# Altium PCB CR99001.PcbDoc
Units mm, origin at the board's own origin, x right, y up, seen from the top; angles counter-clockwise.
Board outline 14 x 14 mm, 2 copper layers (L 01, L 02), stack 1.57 mm thick; 13 components, 12 nets, 33 pads, 1 vias.
Unrouted connection lines stored in the file: 13.
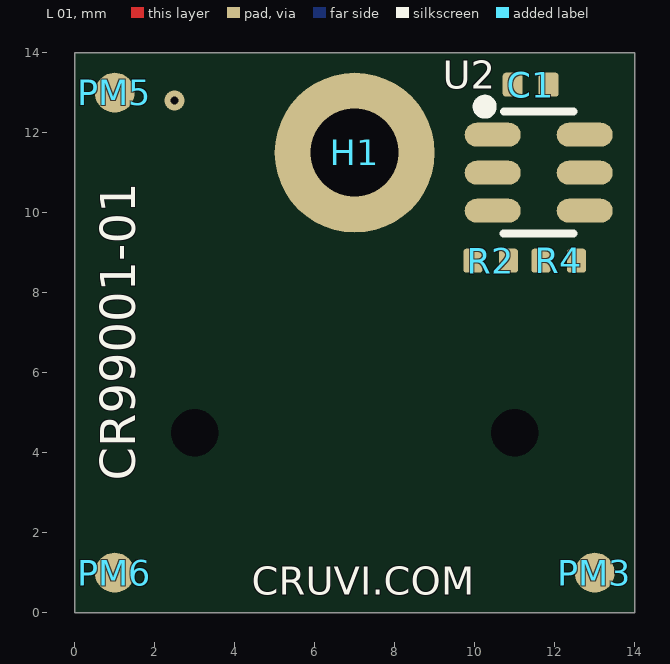
[diagram p0: L 01 view]
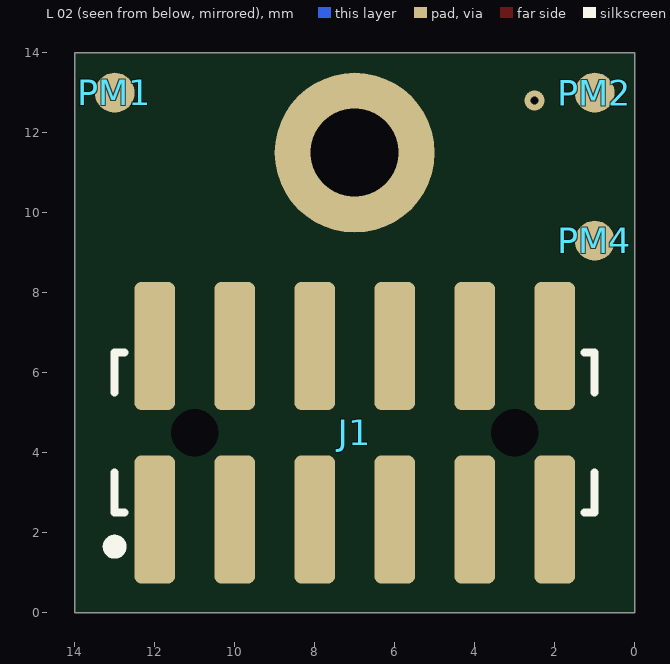
[diagram p1: L 02 view, seen from below]

## Layer stack, top to bottom
Top Solder: solder mask 0.035, Solder Resist, Dk 3.5
L 01: signal copper 0.035
Dielectric1: core 1.5, FR-4, Dk 4.2
L 02: signal copper 0.035
Bottom Solder: solder mask 0.035, Solder Resist, Dk 3.5

## Board outline
0,0 0,14 14,14 14,0

## Design rules (kind name [scope] priority, off if disabled: settings)
BoardOutlineClearance [All] p1: gap=0 except(0.5: Arc-OutlineEdge Track-OutlineEdge SMDPad-OutlineEdge THPad-OutlineEdge Via-OutlineEdge Fill-OutlineEdge Poly-OutlineEdge Region-OutlineEdge)
Clearance Clearance_topbotPoly [InPolygon vs (OnLayer('Multi-Layer') and IsPad) or OnLayer('L 01') or OnLayer('L 06')] p1: gap=0.2
Clearance [All] p2: gap=0.099 except(0.3: Track-Poly Poly-Poly Poly-Region)
ComponentClearance "ComponentClearance_J2PM\"" [(InComponent('J2')) vs (InComponent('PM2'))] p1: gap=-4 collisioncheckmode=3 verticalgap=-1 showdistances=FALSE
ComponentClearance ComponentClearance_H3U7 [(InComponent('H3')) vs (InComponent('U7'))] p2: gap=-0.5 collisioncheckmode=3 verticalgap=-1 showdistances=FALSE
ComponentClearance ComponentClearance_-0.5mm [HasFootprint('FIDU-DOT - small') OR HasFootprint('NetTieTOP_D35mm')or HasFootprint('MHole3_2mm')] p3: gap=-0.5 collisioncheckmode=3 verticalgap=-0.013 showdistances=FALSE
ComponentClearance [All] p4: gap=-0.05 collisioncheckmode=3 verticalgap=0.5 showdistances=TRUE
DiffPairsRouting DiffPairsRouting_D80 [InNetClass('DDR_D80')] p1: maxlimit=0.254 minlimit=0.12 mostfreqgap=0.12 toplayer_minwidth=0.09 toplayer_maxwidth=0.381 toplayer_prefwidth=0.09 bottomlayer_minwidth=0.09 bottomlayer_maxwidth=0.381 bottomlayer_prefwidth=0.09 maxuncoupledlength=12.7
DiffPairsRouting [All] p2: maxlimit=0.12 minlimit=0.12 mostfreqgap=0.12 toplayer_minwidth=0.1 toplayer_maxwidth=0.15 toplayer_prefwidth=0.1 bottomlayer_minwidth=0.1 bottomlayer_maxwidth=0.3 bottomlayer_prefwidth=0.1 maxuncoupledlength=30
FabricationTestPointUsage TestPointUsage [All] p1: valid=0 allowmultiple=FALSE
FabricationTestpoint Testpoint [(IsPad And (OnTopLayer Or OnBottomLayer))] p1: side=3 testpointundercomponent=TRUE minsize=1.016 maxsize=2.54 preferedsize=1.524 minholesize=0 maxholesize=1.016 preferedholesize=0.813 testpointgrid=0.025 allowsidetop=TRUE allowsidebottom=TRUE usegrid=TRUE gridtolerance=0
FanoutControl Fanout_Small [All] p1 off: bgadir=Out bgaviamode=Centered fanoutstyle=Auto fanoutdirection=Alternating viagrid=0.025 // Protel DXP Scope 1 Expression Was: (CompPinCount < 5)   Fanout_Small (Default Rule)
FanoutControl Fanout_Default [All] p2: bgadir=Out bgaviamode=Centered fanoutstyle=Auto fanoutdirection=Alternating viagrid=0.025 // Fanout_Default (Default Rule)
FanoutControl Fanout_SOIC [All] p3 off: bgadir=Out bgaviamode=Centered fanoutstyle=Auto fanoutdirection=Alternating viagrid=0.025 // Protel DXP Scope 1 Expression Was: IsSOIC   Fanout_SOIC (Default Rule)
FanoutControl Fanout_BGA [All] p4 off: bgadir=Out bgaviamode=Centered fanoutstyle=Auto fanoutdirection=Alternating viagrid=0.025 // Protel DXP Scope 1 Expression Was: IsBGA   Fanout_BGA (Default Rule)
FanoutControl Fanout_LCC [All] p5 off: bgadir=Out bgaviamode=Centered fanoutstyle=Auto fanoutdirection=Alternating viagrid=0.025 // Protel DXP Scope 1 Expression Was: IsLCC   Fanout_LCC (Default Rule)
HoleSize [All] p1: absolutevalues=TRUE maxlimit=4 minlimit=0.2 maxpercent=80.000 minpercent=20.000
Length Lendht22mm [(InDifferentialPairClass('Lendht22mm'))] p1: maxlimit=22.2 minlimit=21.8
MinimumAnnularRing [All] p1: minimumring=0.124
MinimumSolderMaskSliver [All] p1: minsoldermaskwidth=0.2
PermittedLayers PermittedLayers-CAP3225 [(HasFootprint('CAPC3216N'))] p1: toplayerpermitted=TRUE bottomlayerpermitted=FALSE
PlaneClearance [All] p1: clearance=0.25
PlaneConnect PlaneConnect_Via [IsVia] p1: planeconnectstyle=Direct reliefexpansion=0.508 reliefentries=4 reliefconductorwidth=0.254 reliefairgap=0.254
PlaneConnect [All] p2: planeconnectstyle=Relief reliefexpansion=0.5 reliefentries=4 reliefconductorwidth=0.2 reliefairgap=0.25
PolygonConnect Direct_J2 [HasFootprint('STIFTLEISTE2_54 OG 1R-14')] p1: connectstyle=Relief reliefconductorwidth=0.254 reliefentries=4 polygonreliefangle="45 Angle" airgapwidth=0.254
PolygonConnect PolygonConnect_TopRilief [InPolygonClass('TopConnect')] p2: connectstyle=Relief reliefconductorwidth=0.254 reliefentries=4 polygonreliefangle="90 Angle" airgapwidth=0.2
PolygonConnect PolygonConnect_Direct [(HasFootprint('MHole2_7mm')) or IsVia or InComponent('H1') or InComponent('H2') or InComponent('H3') or InComponent('H4')] p3: connectstyle=Direct reliefconductorwidth=0.254 reliefentries=4 polygonreliefangle="90 Angle" airgapwidth=0.254 // Protel DXP Scope 1 Expression Was: IsVia
PolygonConnect PolygonConnect_Direct_TP [HasFootprint('TP_0.8mm')] p4: connectstyle=Direct reliefconductorwidth=0.254 reliefentries=4 polygonreliefangle="90 Angle" airgapwidth=0.254 // Protel DXP Scope 1 Expression Was: IsVia
PolygonConnect [All] p5: connectstyle=Relief reliefconductorwidth=0.2 reliefentries=4 polygonreliefangle="90 Angle" airgapwidth=0.2
RoutingLayers "RoutingLayers_impedance control" [(InDifferentialPairClass('All Differential Pairs') OR InNetClass('D100-15') OR InNetClass('D100-25') OR InNetClass('D100-33') OR InNetClass('S50') OR InNetClass('S50-25') OR InNetClass('S50-33') OR InNetClass('S60-15'))] p1: top layer_v5=TRUE bottom layer_v5=TRUE
RoutingLayers [All] p2: top layer_v5=TRUE bottom layer_v5=TRUE
RoutingVias [All] p1: holewidth=0.2 width=0.5 viastyle="Through Hole" minholewidth=0.2 minwidth=0.5 maxholewidth=1 maxwidth=1.5
SMDNeckDown SMDNeckDown_80% [All] p1: percent=95.000
SMDToPlane [All] p1: distance=39370
SilkToBoardRegionClearance [All] p1 off:
SilkToSilkClearance [All] p1: silktosilkclearance=0.01
SilkToSolderMaskClearance SilkscreenOverComponentPads [IsPad] p1: minsilkscreentomaskgap=0.01 clearancetoexposedcopper=TRUE
SolderMaskExpansion SolderMaskExpansion_Via [IsVia] p1: expansion=-0.15
SolderMaskExpansion [All] p2: expansion=0
Width Width_S40 [InNetClass('DDR_S40')] p1: maxlimit=0.15 minlimit=0.1 preferedwidth=0.15 minimp=50.000000 maximp=50.000000 favimp=50.000000
Width Logo [(InComponent('LOGO*'))] p2: maxlimit=0.254 minlimit=0.001 preferedwidth=0.254 // Protel DXP Scope 1 Expression Was: (InComponent('LOGO?'))
Width All [All] p3: maxlimit=3 minlimit=0.1 preferedwidth=0.1 minimp=50.000000 maximp=50.000000 favimp=50.000000
13 further rules are at their usual default settings.

## Components (designator, comment, footprint, x,y, rotation, side; value= is the part's Value field where it differs from the comment)
C1 "470nF" CAPC1005X55N 11.4,13.2 r180 top
H1 "Mount.Hole 2mm" MHole2_2mm 7,11.5 r0 top
J1 "TMMH-106-04-F-DV-A-M" TMMH-106-04-T-DV-A 7,4.5 r180 bottom locked
PM1 "FIDU-DOT - mini" "FIDU-DOT - mini" 13,13 r180 bottom
PM2 "FIDU-DOT - mini" "FIDU-DOT - mini" 1,13 r180 bottom
PM3 "FIDU-DOT - mini" "FIDU-DOT - mini" 13,1 r0 top
PM4 "FIDU-DOT - mini" "FIDU-DOT - mini" 1,9.3 r180 bottom
PM5 "FIDU-DOT - mini" "FIDU-DOT - mini" 1,13 r0 top
PM6 "FIDU-DOT - mini" "FIDU-DOT - mini" 1,1 r0 top
R2 "4K7" RESC1005X40N 10.4,8.8 r180 top
R4 "4K7" RESC1005X40N 12.1,8.8 r0 top
SNAP1 "SNAP CRUVI 3x" CRUVI_3x_Snap 29.86,2.5 r0 top locked
U2 "24AA025E48T-I/OT" SOT95P280X145-6N 11.6,11 r0 top locked

## Footprints (in the part's own frame and the unit in brackets; to place one, negate y for a bottom-side part, rotate by r counter-clockwise, add the part's x,y. Pads: shape width x height; smd on the part's side, far side on the other; paste and mask are expansions set on the pad)
CAPC1005X55N [mm] "Vishay VJ0402 1 x 0.5mm (+/- 0.05), 0.25mm +0.05/-0.1mm Kontakte"
  rrect33% 0.5x0.6 smd: 1(-0.45,0) 2(0.45,0)
  body extent -0.5,-0.25 0.5,0.25, height 0.5
CRUVI_3x_Snap [mm]
"FIDU-DOT - mini" [mm]
  round 1 smd paste-1: 0(0,0)
MHole2_2mm [mm]
  round 4 hole 2.2: 1(0,0)
RESC1005X40N [mm] "Vishay D0402 1 x 0.5mm (+/- 0.05), 0.2mm +/-0.1mm Kontakte"
  rrect33% 0.48x0.6 smd: 1(-0.445,0) 2(0.445,0)
  body extent -0.5,-0.25 0.5,0.25, height 0.35
SOT95P280X145-6N [mm]
  oval 1.4x0.6 smd: 1(-1.15,0.95) 2(-1.15,0) 3(-1.15,-0.95) 4(1.15,-0.95) 5(1.15,0) 6(1.15,0.95)
  silkscreen extent -1.5,-1.53 0.87,1.8, body extent -1.35,-1.45 1.35,1.45, height 1.45
TMMH-106-04-T-DV-A [mm]
  rrect33% 1.016x3.2 smd: 1(-5,-2.17) 2(-5,2.17) 3(-3,-2.17) 4(-3,2.17) 5(-1,-2.17) 6(-1,2.17) 7(1,-2.17) 8(1,2.17) 9(3,-2.17) 10(3,2.17) 11(5,-2.17) 12(5,2.17)
  round 0 hole 1.19 unplated: H1(-4,0) H2(4,0)
  silkscreen extent -6.15,-3 6,2, body extent -6,-3.52 6,3.52, height 4.42

## Part data
C1: library part 23659, "KON 470nF 6,3V X5R SMD BF 1005 (0402)"
H1: library part 27273
J1: library part 28976
PM1 PM2 PM3 PM4 PM5 PM6: library part 27037, "FIDU-DOT - MINI 0.5mm"
R2 R4: library part 22585, "WID SMD 4K7 1% 0,063W BF 1005 (0402)"
SNAP1: library part 29977, "SNAP for CRUVI 3x"
U2: library part 26249

## Via types
v1: diameter 0.5, hole 0.2, L 01 to L 02, 1 vias

## Nets (pads, with @x,y where several pads share a name; then routed paths per layer and width w, separated by ;. In a path a pad name is that pad's centre, name@x,y a point inside that pad or via, vN(x,y) a via of type N, cw(c..) or ccw(c..) an arc to the next point about the centre after c; other vN are vias at no path point)
CLK: J1.8
DQ2: J1.5
DQ3: J1.3
GND: C1.2 H1.1 J1.6 U2.2
MISO: J1.7
MOSI: J1.9
RFU: J1.11
SCL: J1.2 R4.2 U2.1
SDA: J1.1 R2.2 U2.3
SEL: J1.4
VBUS: J1.12
VCC: C1.1 J1.10 R2.1 R4.1 U2.4 U2.5 U2.6
pads on no net: J1.H1 J1.H2 PM1.0 PM2.0 PM3.0 PM4.0 PM5.0 PM6.0
copper on no net:
  other v1: 2.5,12.8

## Silkscreen, mask and mechanical layers (free items; w line width, h text height)
Top Overlay:
  text "CR99001-01" at 1.8,3.3 h1.5 r90
  text "CRUVI.COM" at 4.425,0.45 h0.7
PCB-Outline-GM6:
  the board outline again, w0.1
Size Top-GM11:
  lines w0.1: 0,-2.5 0,13.5 ; 14,-2.5 14,13.5

## Dimensions
11,4.5 to 7,11.5 on Dim-Top-GM1
0,0 to 14,0 on Dim-Top-GM1
14,0 to 14,14 on Dim-Top-GM1
14,0 to 7,11.5 on Dim-Top-GM1
0,14 to 7,11.5 on Dim-Top-GM1

## Text inside footprints (layer, text, board x,y; h text height)
J1: Assembly Bot-GM14 "11" at 2.35,2.85 h0.5; Assembly Bot-GM14 "12" at 2.45,5.6 h0.5; Assembly Bot-GM14 "1" at 12.1,2.85 h0.5; Assembly Bot-GM14 "2" at 12.25,5.6 h0.5
SNAP1: Size Top-GM11 "1" at 58.16,1.5 h0.7; Size Top-GM11 "2" at 57.96,6.6 h0.7; Size Top-GM11 "12" at 46.86,6.6 h0.7; Size Top-GM11 "11" at 46.86,1.5 h0.7; Size Top-GM11 "2" at 59.02,-18.7 h0.7; Size Top-GM11 "1" at 59.12,-13.9 h0.7; Size Top-GM11 "59" at 45.32,-13.9 h0.7; Size Top-GM11 "60" at 45.32,-18.7 h0.7; Size Top-GM11 "60" at 22.46,-18.7 h0.7; Size Top-GM11 "59" at 22.46,-13.9 h0.7; Size Top-GM11 "1" at 36.26,-13.9 h0.7; Size Top-GM11 "2" at 36.16,-18.7 h0.7; Size Top-GM11 "11" at 24,1.5 h0.7; Size Top-GM11 "12" at 24,6.6 h0.7; Size Top-GM11 "2" at 35.1,6.6 h0.7; Size Top-GM11 "1" at 35.3,1.5 h0.7; Size Top-GM11 "2" at 13.3,-18.7 h0.7; Size Top-GM11 "1" at 13.4,-13.9 h0.7; Size Top-GM11 "59" at -0.4,-13.9 h0.7; Size Top-GM11 "60" at -0.4,-18.7 h0.7; Size Top-GM11 "1" at 12.44,1.5 h0.7; Size Top-GM11 "2" at 12.24,6.6 h0.7; Size Top-GM11 "12" at 1.14,6.6 h0.7; Size Top-GM11 "11" at 1.14,1.5 h0.7; Size Top-GM11 "HS A connector" at -0.9,-12.6 h0.7; Size Top-GM11 "HS B connector" at 21.96,-12.6 h0.7; Size Top-GM11 "HS C connector" at 44.82,-12.6 h0.7; Size Top-GM11 "LS A connector" at 46.52,0.25 h0.7; Size Top-GM11 "LS B connector" at 23.66,0.25 h0.7; Size Top-GM11 "LS C connector" at 0.8,0.225 h0.7